# EAGLE board combo (EAGLE 7.2.0)
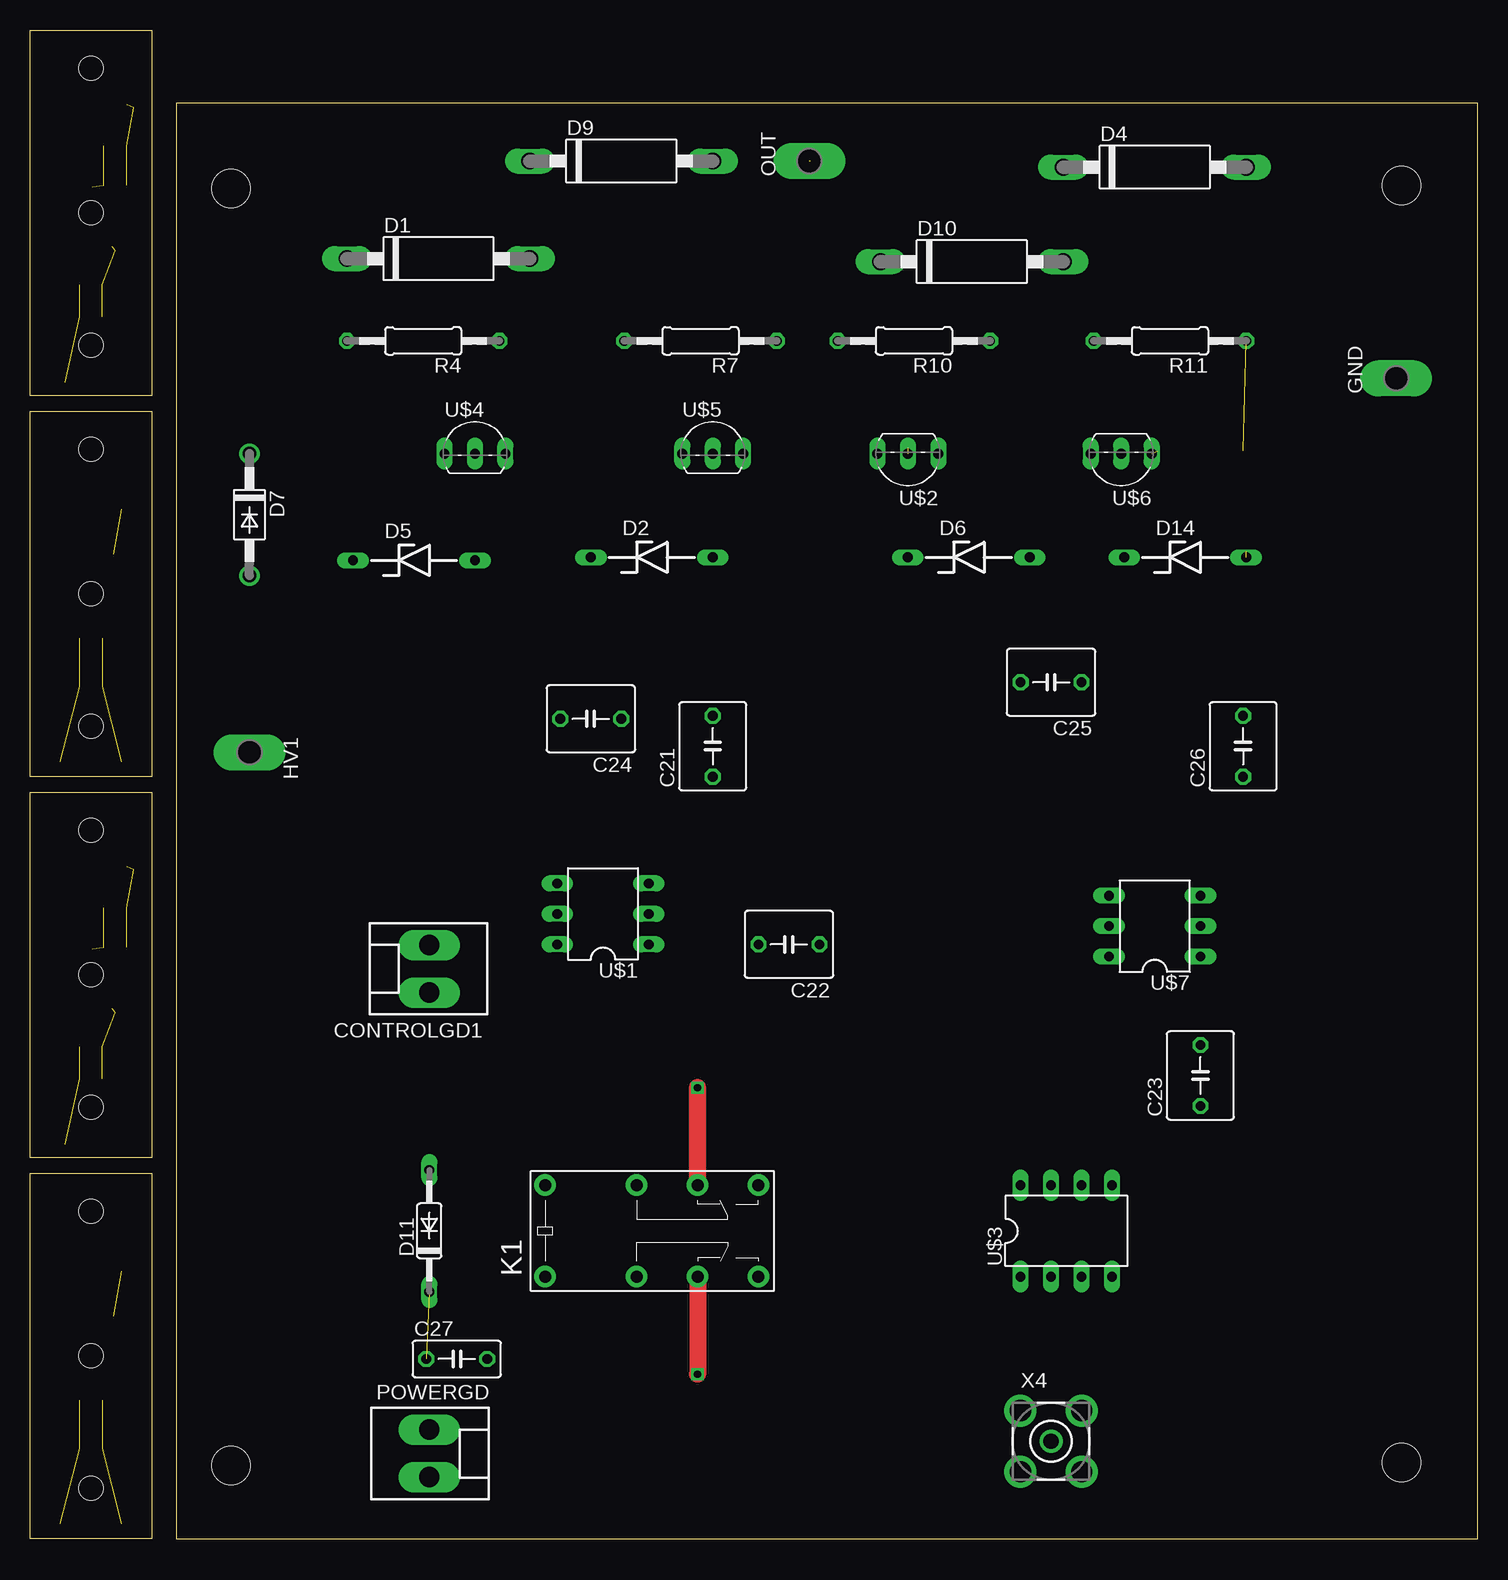
[diagram p0: board, top side]
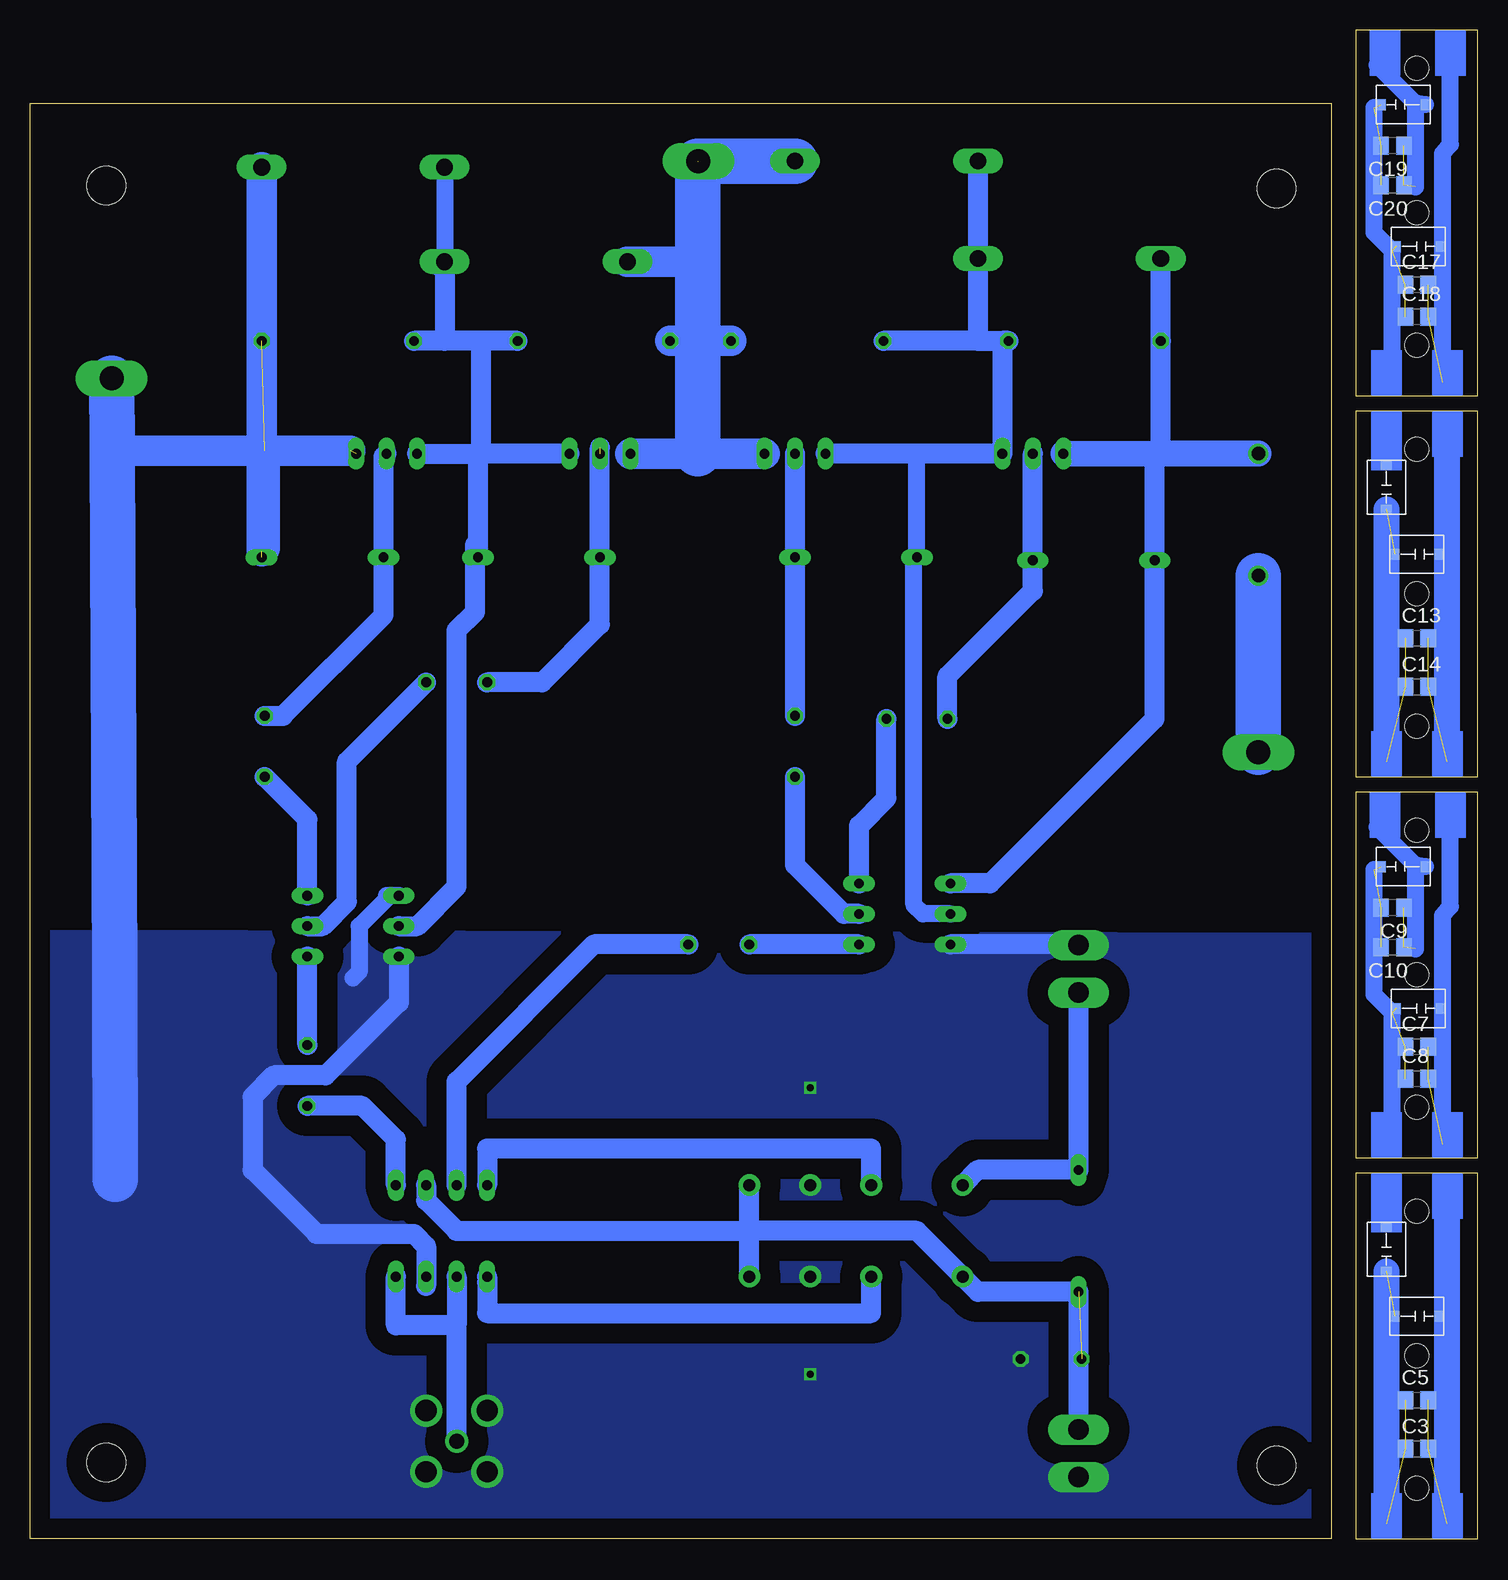
[diagram p1: board, bottom side, seen from below]

Size 120.65 x 125.73 mm. Coordinates in mm from the lower left corner, seen from the top.
Outline: 10.16,0 0,0 0,30.48 10.16,30.48 10.16,0
Outline: 10.16,31.75 0,31.75 0,62.23 10.16,62.23 10.16,31.75
Outline: 10.16,63.5 0,63.5 0,93.98 10.16,93.98 10.16,63.5
Outline: 10.16,95.25 0,95.25 0,125.73 10.16,125.73 10.16,95.25
Outline: 120.65,0 120.65,119.63 12.19,119.63 12.19,0 120.65,0
Copper layers (1*16): Top 0.035mm / dielectric 1.5mm / Bottom 0.035mm
Design rules "default": minimum track width 10mil, minimum drill 24mil, track to track 8mil, track to pad 8mil, pad to pad 8mil, via to via 8mil, smd to smd 8mil, copper to edge 40mil, drill to drill 8mil, minimum pad ring 10mil, minimum via ring 8mil, stop-mask expansion 4mil, vias tented up to drill 0mil, thermal gap 10mil
Holes 2 mm at 5.08,15.24 5.08,27.3 5.08,4.22 5.08,46.99 5.08,35.97 5.08,59.05 5.08,78.74 5.08,90.81 5.08,67.72 5.08,110.49 5.08,99.47 5.08,122.56
Holes 3.2 mm at 16.76,112.52 114.3,112.78 114.3,6.35 16.76,6.1

## Footprints (pad centres in the part's own frame; a part is rotated, then mirrored left to right if it is on the bottom)
SGC3S = smd 0.9 x 0.8: P$1 0,1.85; P$2 0,-1.85
C0805 = smd 1.3 x 1.5: 1 -0.95,0; 2 0.95,0
C050-055X075 = drill 0.813 octagon: 1 -2.54,0; 2 2.54,0
C050-030X075 = drill 0.813 octagon: 1 -2.54,0; 2 2.54,0
KK-156-2 = drill 1.7 pad 2.184 long: 1 -1.98,0; 2 1.98,0
C1702-15 = drill 1.397 long: A 7.62,0; C -7.62,0
ZDIO-10 = drill 0.813 long: A 5.08,0; C -5.08,0
DO41-10 = drill 1.118: A 5.08,0; C -5.08,0
DO35-10 = drill 0.813 long: A 5.08,0; C -5.08,0
P1-20Y = drill 2.007 pad 2.54 long: TP 0,0
G5V-2 = drill 1 pad 1.8: 1 -8.89,-3.81; 4 -1.27,-3.81; 6 3.81,-3.81; 8 8.89,-3.81; 9 8.89,3.81; 11 3.81,3.81; 13 -1.27,3.81; 16 -8.89,3.81
0207/12 = drill 0.813 octagon: 1 -6.35,0; 2 6.35,0
DIL06 = drill 0.813 long: 1 -2.54,-3.81; 2 0,-3.81; 3 2.54,-3.81; 4 2.54,3.81; 5 0,3.81; 6 -2.54,3.81
TO92- = drill 0.813 long: 1 2.54,0; 2 0,0; 3 -2.54,0
DIL08 = drill 0.813 long: 1 -3.81,-3.81; 2 -1.27,-3.81; 3 1.27,-3.81; 4 3.81,-3.81; 5 3.81,3.81; 6 1.27,3.81; 7 -1.27,3.81; 8 -3.81,3.81
BU-SMA-V = drill 1.27: 1 0,0 | drill 1.778: 2 -2.55,2.55; 3 2.55,2.55; 4 2.55,-2.55; 5 -2.55,-2.55

## Placement (x,y rotation side)
C1  5-20  [SGC3S]  7.62,24.13 180 bottom
C2  10-30  [SGC3S]  5.08,18.54 270 bottom
C3  100p  [C0805]  5.08,7.49 0 bottom
C4  5-20  [SGC3S]  6.22,56.01 90 bottom
C5  50p  [C0805]  5.08,11.56 0 bottom
C6  5-20  [SGC3S]  4.95,44.2 270 bottom
C7  1000  [C0805]  5.08,41.02 0 bottom
C8  220  [C0805]  5.08,38.35 0 bottom
C9  220p  [C0805]  7.11,52.58 180 bottom
C10  1000p  [C0805]  7.11,49.28 180 bottom
C11  5-20  [SGC3S]  7.62,87.63 180 bottom
C12  10-30  [SGC3S]  5.08,82.04 270 bottom
C13  50p  [C0805]  5.08,75.06 0 bottom
C14  100p  [C0805]  5.08,70.99 0 bottom
C15  5-20  [SGC3S]  6.22,119.51 90 bottom
C16  5-20  [SGC3S]  4.95,107.7 270 bottom
C17  1000  [C0805]  5.08,104.52 0 bottom
C18  220  [C0805]  5.08,101.85 0 bottom
C19  220p  [C0805]  7.11,116.08 180 bottom
C20  1000p  [C0805]  7.11,112.78 180 bottom
C21  [C050-055X075]  56.9,66.04 90 top
C22  [C050-055X075]  63.25,49.53 180 top
C23  [C050-055X075]  97.54,38.61 90 top
C24  [C050-055X075]  46.74,68.33 180 top
C25  [C050-055X075]  85.09,71.37 180 top
C26  [C050-055X075]  101.09,66.04 90 top
C27  [C050-030X075]  35.56,14.99 0 top
CONTROLGD1  [KK-156-2]  33.27,47.5 90 top
D1  P6KEXXA  [C1702-15]  34.04,106.68 0 top
D2  4742  [ZDIO-10]  51.82,81.79 0 top
D4  P6KEXXA  [C1702-15]  93.73,114.3 0 top
D5  4742  [ZDIO-10]  32,81.53 0 top
D6  4742  [ZDIO-10]  78.23,81.79 0 top
D7  1N4004  [DO41-10]  18.29,85.34 270 top
D9  P6KEXXA  [C1702-15]  49.28,114.81 0 top
D10  P6KEXXA  [C1702-15]  78.49,106.43 0 top
D11  1N4148DO35-10  [DO35-10]  33.27,25.65 90 top
D14  4742  [ZDIO-10]  96.27,81.79 0 top
GND  TPPAD1-20Y  [P1-20Y]  113.84,96.7 90 top
HV1  TPPAD1-20Y  [P1-20Y]  18.29,65.53 270 top
K1  G5V-2  [G5V-2]  51.82,25.65 0 top
OUT  TPPAD1-20Y  [P1-20Y]  64.95,114.81 90 top
POWERGD  [KK-156-2]  33.27,7.11 270 top
R4  10M  [0207/12]  32.77,99.82 180 top
R7  10M  [0207/12]  55.88,99.82 180 top
R10  10M  [0207/12]  73.66,99.82 180 top
R11  10M  [0207/12]  95,99.82 180 top
U$1  DA-2320  [DIL06]  47.75,52.07 90 top
U$2  VN0550  [TO92-]  73.15,90.42 180 top
U$3  UCC27425  [DIL08]  86.36,25.65 0 top
U$4  VP0550  [TO92-]  37.08,90.42 0 top
U$5  VP0550  [TO92-]  56.9,90.42 0 top
U$6  VN0550  [TO92-]  90.93,90.42 180 top
U$7  DA-2320  [DIL06]  93.73,51.05 90 top
X4  BU-SMA-V  [BU-SMA-V]  85.09,8.13 0 top

## Library data of the parts
C1 C2 C4 C6 C11 C12 C15 C16 = sprague
C3 C5 C7-C10 C13 C14 C17-C20 C27 R4 R7 R10 R11 = rcl
C21-C26 = resistor
CONTROLGD1 POWERGD = con-molex; OC_FARNELL: unknown; OC_NEWARK: unknown
D1 D2 D4-D7 D9-D11 D14 = diode
GND HV1 OUT = testpad
K1 = relay; MPN: G5V-2 5DC; OC_FARNELL: 9949488; OC_NEWARK: 78K5703
U$1 U$7 = trafo
U$2 U$4-U$6 = transistor-fet
U$3 = texas
X4 = con-coax; OC_FARNELL: unknown; OC_NEWARK: unknown

## Nets
+15V: C27.1 D11.C K1.1 K1.8 K1.9 POWERGD.1 U$3.6
ENSW: CONTROLGD1.1 D11.A K1.16
GND: C27.2 CONTROLGD1.2 D4.A D14.A GND.TP K1.6 K1.11 POWERGD.2 R11.1 U$1.6 U$3.3 U$6.3 U$7.4 U$7.6 X4.2 X4.3 X4.4 X4.5
N$1: C1.P$1 C2.P$2 C3.1 C5.1
N$2: C4.P$1 C6.P$2 C7.1 C8.1 C9.2 C10.2
N$3: C4.P$2 C9.1 C10.1
N$4: C7.2 C8.2
N$5: C11.P$1 C12.P$2 C13.1 C14.1
N$6: C11.P$2
N$7: C1.P$2
N$8: C3.2 C5.2
N$9: C13.2 C14.2
N$10: C15.P$1 C16.P$2 C17.1 C18.1 C19.2 C20.2
N$11: C15.P$2 C19.1 C20.1
N$12: C17.2 C18.2
N$13: U$3.2 U$3.4 X4.1
N$14: C22.2 U$1.1
N$15: C22.1 U$3.7
N$16: C23.1 U$3.5
N$17: K1.4 U$3.1
N$18: K1.13 U$3.8
N$19: C21.1 U$1.2
N$20: C24.1 U$1.3
N$21: C21.2 D2.A U$5.2
N$22: C25.1 U$7.2
N$23: C26.1 U$7.3
N$24: C24.2 D5.A U$4.2
N$25: C25.2 D6.C U$2.2
N$26: D1.C D5.C D7.C R4.2 U$1.4 U$4.3
N$27: C26.2 D14.C U$6.2
N$28: D9.A D10.C OUT.TP R7.1 R10.2 U$2.1 U$5.1
N$29: D7.A HV1.TP
N$30: C23.2 U$7.1
N$31: U$7.5
N$32: D4.C D6.A D10.A R10.1 R11.2 U$2.3 U$6.1
N$33: D1.A D2.C D9.C R4.1 R7.2 U$1.5 U$4.1 U$5.3

## Tracks (layer width: path | path; a pad name or v marks a point on that pad's centre or on a via)
+15V  (1 unrouted)
  Bottom 1.676: POWERGD.1 D11.C 41.66,20.57 K1.1 46.74,25.65 60.71,25.65 | 60.71,25.65 85.09,25.65 87.63,28.19 U$3.6 | 60.71,25.65 K1.9 | K1.8 60.71,25.65
ENSW
  Bottom 1.676: CONTROLGD1.1 D11.A 41.66,30.73 K1.16
GND  (via drill 0.6)  (3 unrouted)
  Top 1.422: K1.11 v55.63,37.59 | K1.6 v55.63,13.72
  Bottom 1.422: U$7.4 90.93,53.59 90.93,53.34 93.22,51.05 93.22,47.24 93.73,46.74
  Bottom 1.676: CONTROLGD1.2 33.27,49.53 U$1.6 | U$7.6 89.92,44.7 96.01,38.61 100.33,38.61 102.11,36.83 102.11,30.73 96.77,25.4 88.65,25.4 87.63,24.38 87.63,21.08
  Bottom 2.54: D4.A 101.35,82.3 101.09,82.55 101.09,90.68 93.98,90.68 113.81,90.68
  Bottom 3.81: GND.TP 113.81,90.68 113.59,46.94 113.54,29.97
  pour Bottom (isolate 1.676, no thermals): 12.19,-0.25 11.94,50.29 120.65,50.55 120.9,0
N$1  (3 unrouted)
  Bottom 2.184: C1.P$1 7.62,1.27
N$2  (6 unrouted)
  Bottom 1.422: 7.11,34.16 7.11,43.81 8.64,45.34 8.64,55.75
N$3  (2 unrouted)
  Bottom 1.422: C4.P$2 5.21,56.13 | 8.38,59.31 5.21,56.13 | 5.21,56.13 5.21,49.15
N$4  (2 unrouted)
  Bottom 1.422: 2.92,32.89 2.92,51.94 2.29,52.7 2.29,60.58
N$5  (3 unrouted)
  Bottom 2.184: C11.P$1 7.62,64.77
N$8  (2 unrouted)
  Bottom 2.184: 2.54,1.27 2.54,27.94
N$9  (2 unrouted)
  Bottom 2.184: 2.54,64.77 2.54,91.44
N$10  (6 unrouted)
  Bottom 1.422: 7.11,97.66 7.11,107.31 8.64,108.84 8.64,119.25
N$11  (2 unrouted)
  Bottom 1.422: C15.P$2 5.21,119.63 | 8.38,122.81 5.21,119.63 | 5.21,119.63 5.21,112.65
N$12  (2 unrouted)
  Bottom 1.422: 2.92,96.39 2.92,115.44 2.29,116.2 2.29,124.08
N$13
  Bottom 1.676: X4.1 85.09,17.78 | U$3.2 85.09,17.78 | 85.09,17.78 90.17,17.78 U$3.4
N$14
  Bottom 1.676: U$1.1 C22.2
N$15
  Bottom 1.676: U$3.7 85.09,38.1 73.66,49.53 C22.1
N$16
  Bottom 1.676: U$3.5 90.17,33.27 92.96,36.07 C23.1
N$17
  Bottom 1.676: 82.55,21.34 U$3.1 82.55,18.8 50.55,18.8 K1.4
N$18
  Bottom 1.676: K1.13 50.55,32.51 82.55,32.51 U$3.8
N$19
  Bottom 1.676: U$1.2 52.83,52.07 56.9,56.13 C21.1
N$20
  Bottom 1.676: U$1.3 51.56,59.44 49.28,61.72 C24.1
N$21
  Bottom 1.676: C21.2 D2.A U$5.2
N$22
  Bottom 1.676: U$7.2 96.27,51.05 94.23,53.09 94.23,64.77 C25.1
N$23
  Bottom 1.676: U$7.3 97.54,59.94 C26.1
N$24
  Bottom 1.676: C24.2 44.2,71.88 37.08,78.99 D5.A U$4.2
N$25  (1 unrouted)
  Bottom 1.676: C25.2 77.98,71.37 73.15,76.2 D6.C 73.15,90.93
N$26
  Bottom 1.676: 26.42,90.42 34.29,90.17 U$4.3 | 26.42,90.42 26.68,90.44 26.92,90.19 D5.C 26.92,68.33 40.64,54.61 U$1.4 | 26.42,90.42 R4.2 D1.C
  Bottom 2.184: D7.C 26.42,90.42 | U$4.3 26.68,90.44
N$27
  Bottom 1.676: U$6.2 91.19,90.17 D14.C 91.19,76.96 99.57,68.58 C26.2
N$28  (1 unrouted)
  Bottom 2.54: U$5.1 65.02,90.42 U$2.1 | R10.2 65.02,99.82 R7.1 | D10.C 65.02,106.43
  Bottom 3.81: D9.A 65.02,114.81 65.02,106.43 65.02,99.82 65.02,90.42
N$29
  Bottom 3.81: D7.A HV1.TP
N$30
  Bottom 1.676: C23.2 U$7.1
N$31
  Bottom 1.676: U$7.5 88.39,51.05 85.09,54.36 85.09,75.69 83.57,77.22 83.57,82.8
N$32
  Bottom 1.422: D4.C D10.A 86.11,105.92 86.61,105.92
  Bottom 1.676: U$2.3 83.31,90.42 | R10.1 83.31,99.82 | 83.31,99.82 86.11,99.82 | 86.11,99.82 R11.2 | D10.A 86.11,99.82 | D6.A 83.31,90.42 | U$6.1 83.31,90.42 | 83.31,90.42 83.06,90.17 83.06,99.57 83.31,99.82
N$33
  Bottom 1.422: U$1.5 46.23,52.07 46.99,52.83 46.99,81.53 D2.C 46.74,90.17 46.99,90.42
  Bottom 1.676: U$5.3 46.99,90.42 U$4.1 39.62,99.82 | D9.C D1.A 41.66,99.82 | 41.66,99.82 39.62,99.82 | 41.66,99.82 R7.2 | R4.1 39.62,99.82
(copper drawn outside any net)
  shapes: Bottom area x18